# Altium PCB PCB_Lopta.PcbDoc
Units mm, origin at the board's own origin, x right, y up, seen from the top; angles counter-clockwise.
Board outline 42 x 41.3 mm, 2 copper layers (Top Layer, Bottom Layer), stack 1.671 mm thick; 27 components, 18 nets, 155 pads, 0 vias.
Unrouted connection lines stored in the file: 85.
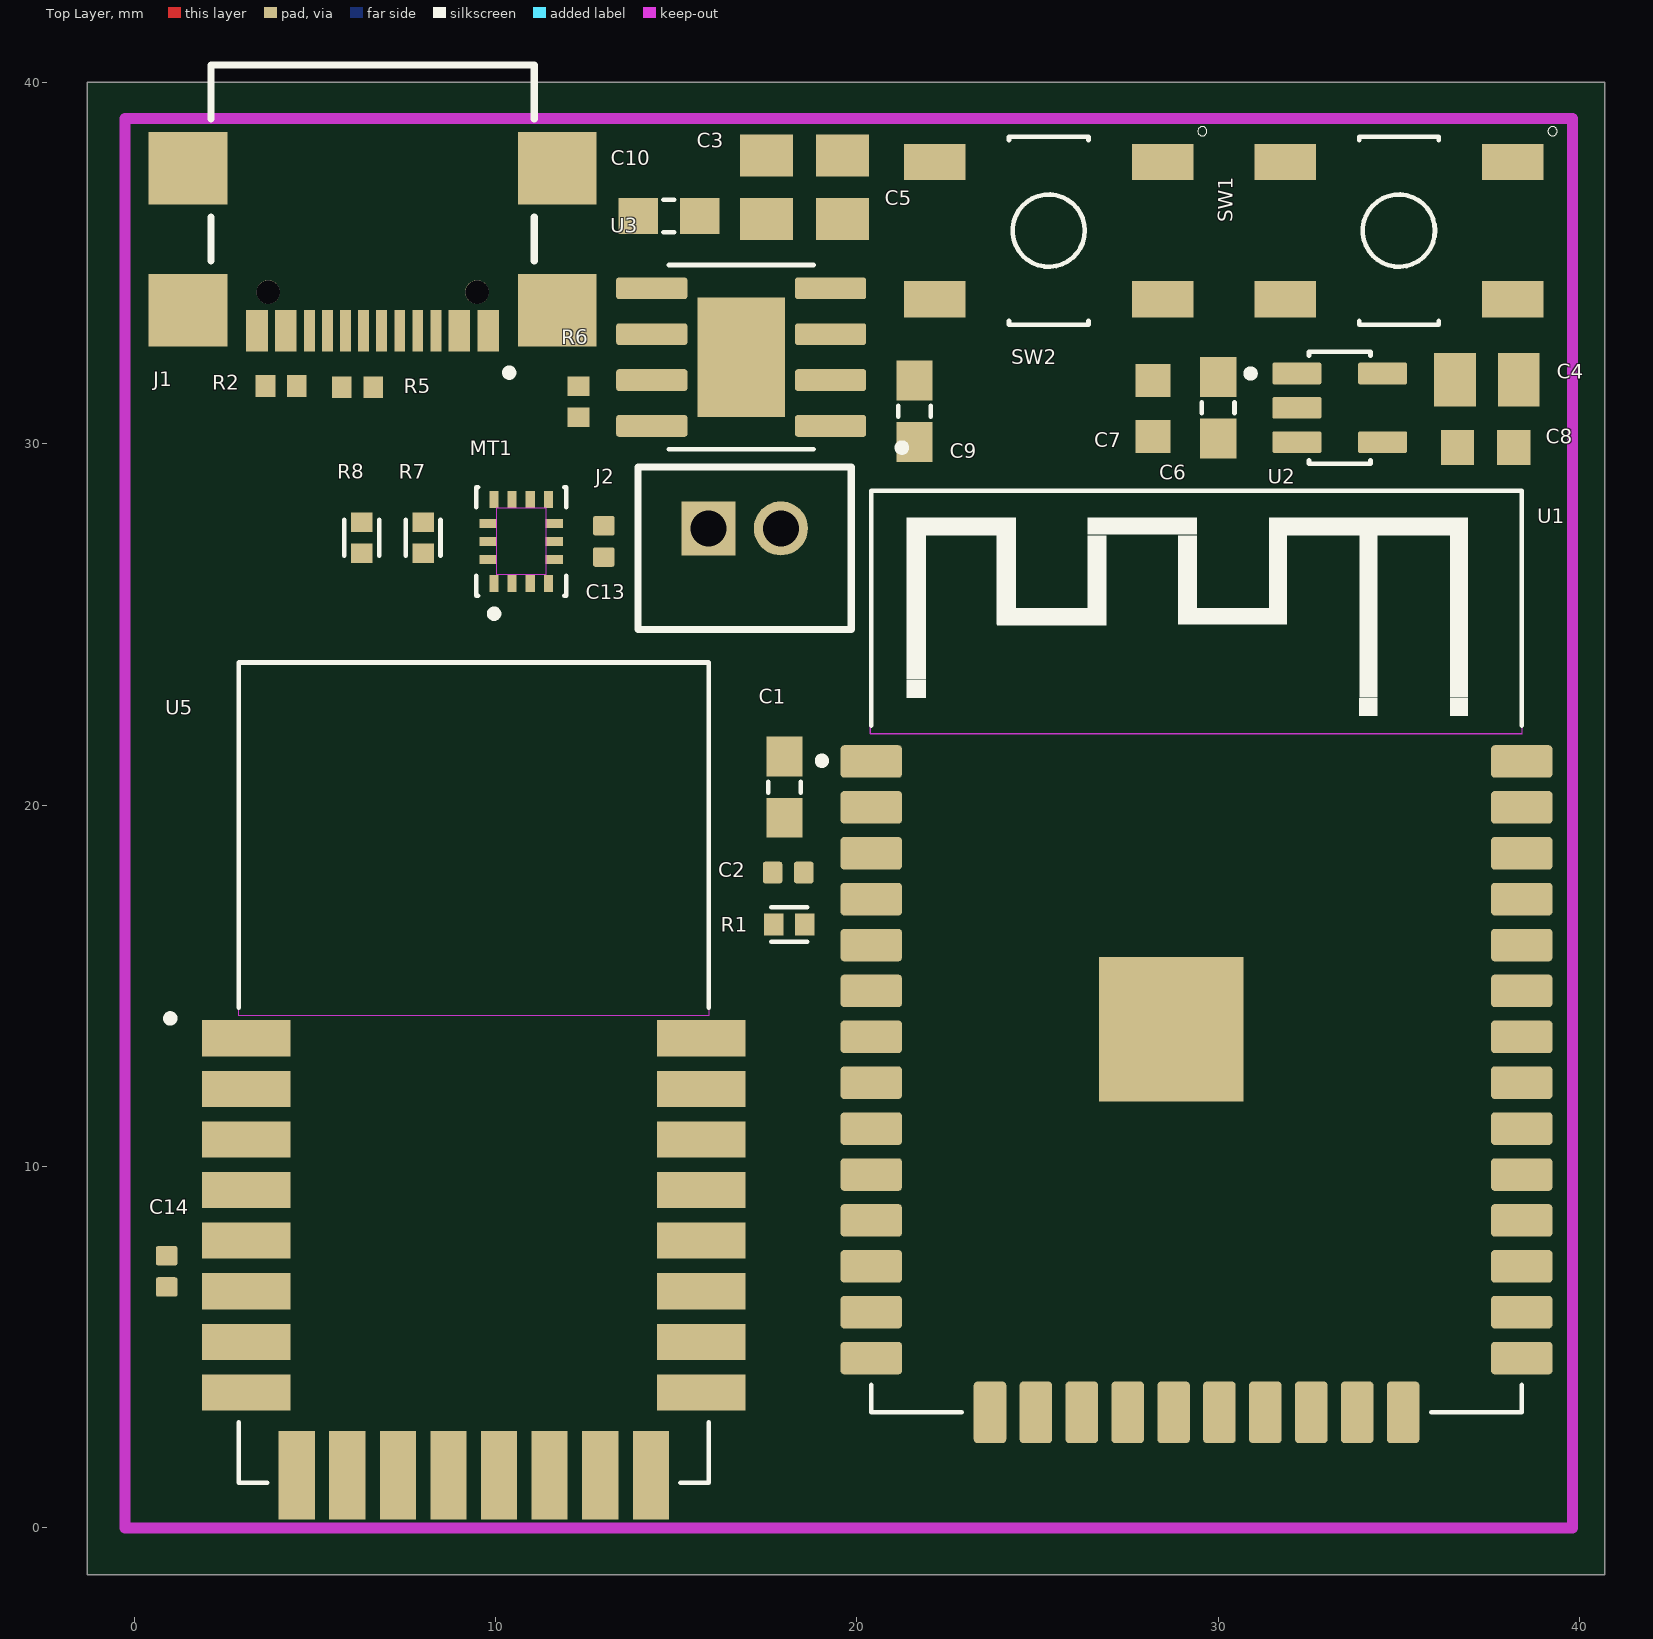
[diagram p0: Top Layer view]
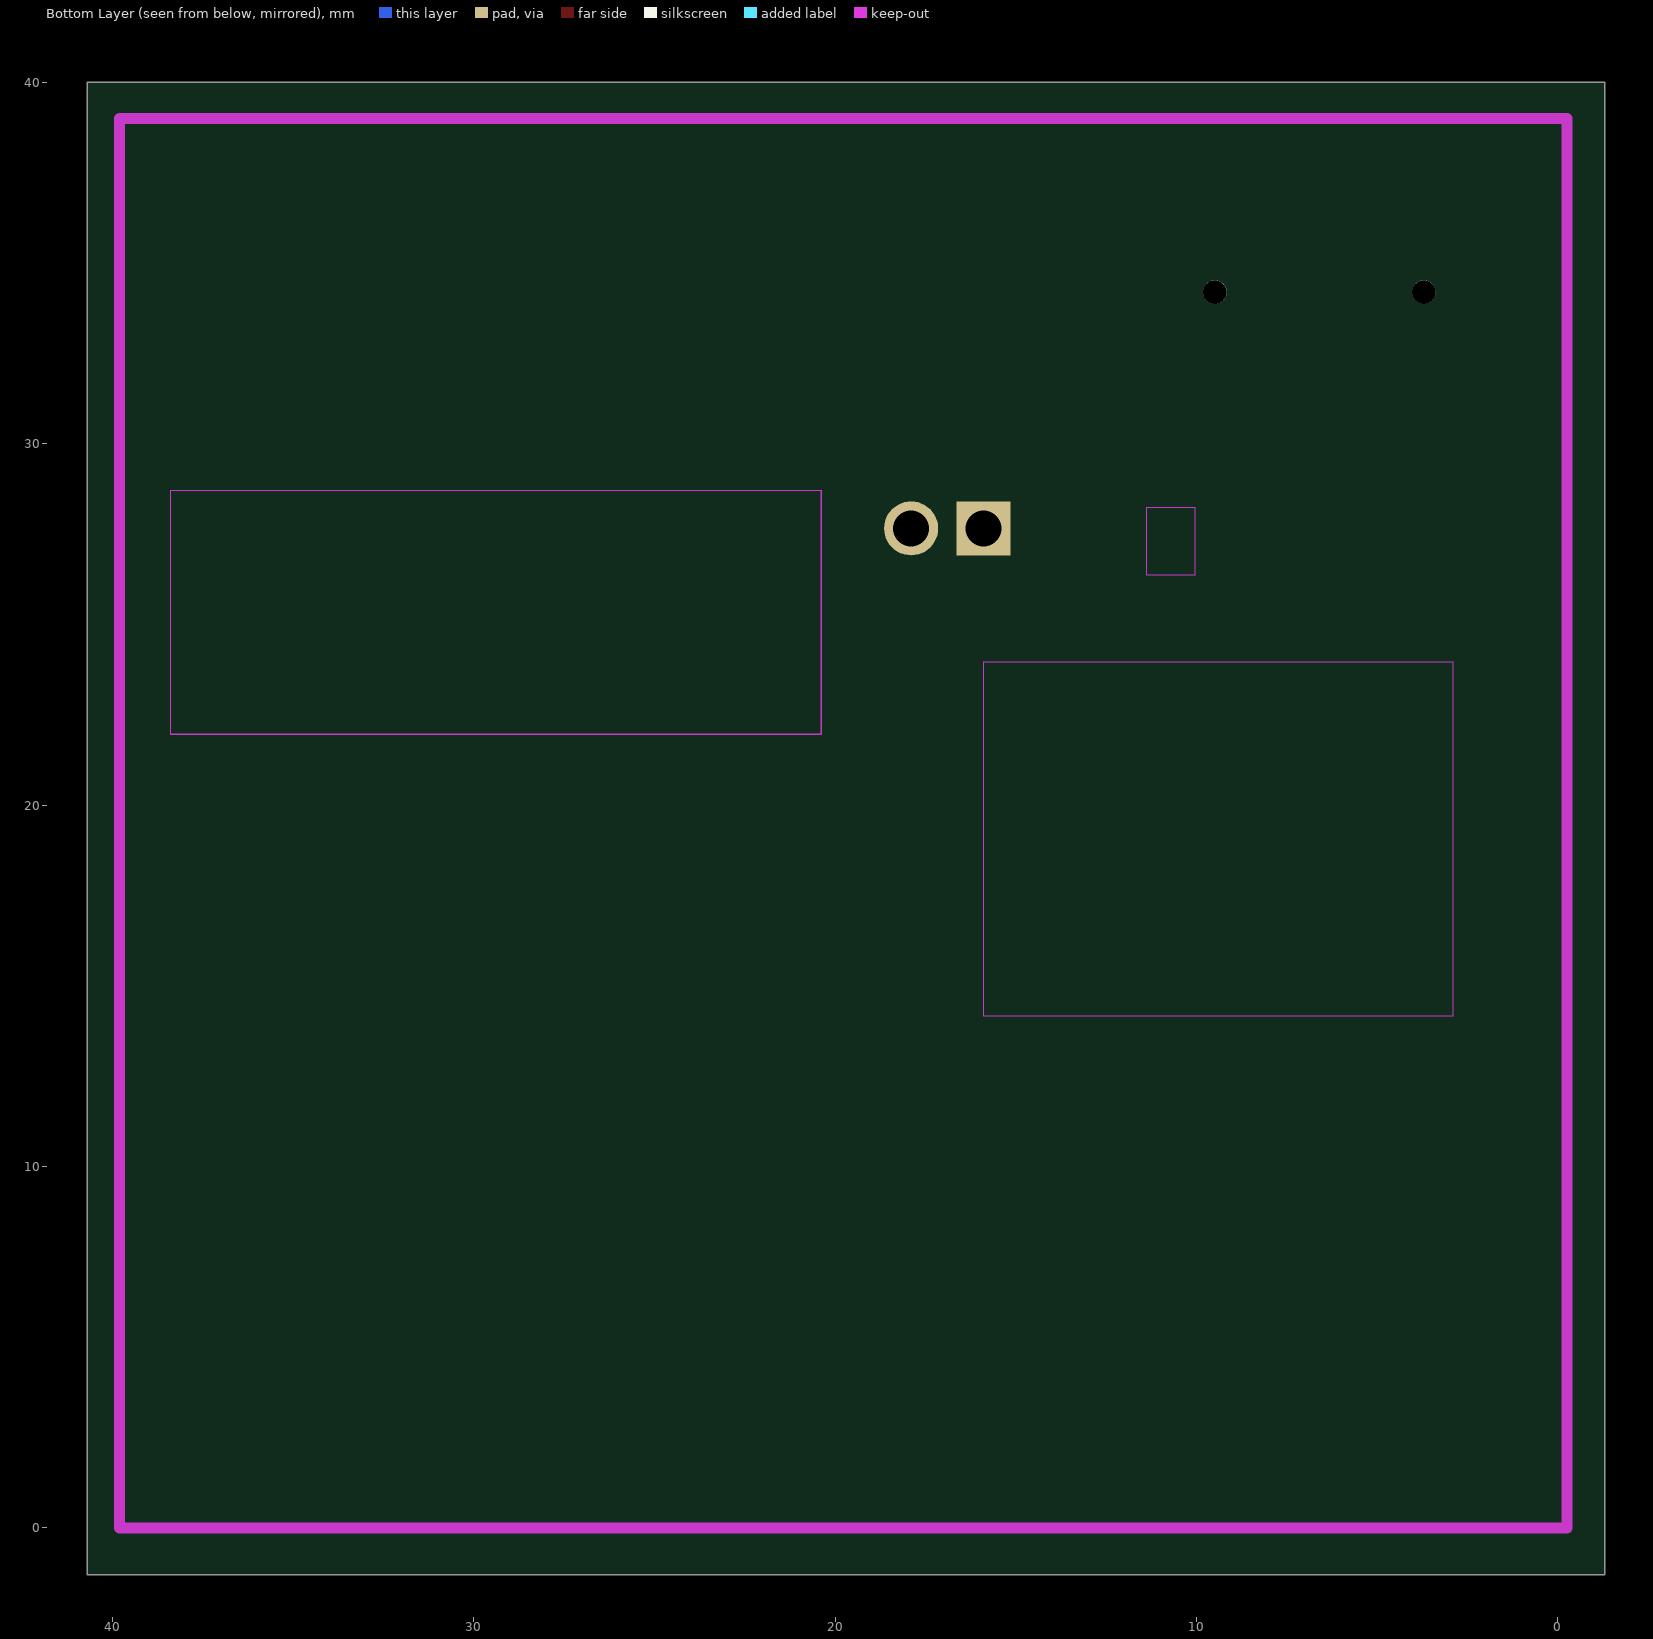
[diagram p1: Bottom Layer view, seen from below]

## Layer stack, top to bottom
Top Solder: solder mask 0.0102, Solder Resist, Dk 3.5
Top Layer: signal copper 0.0356
Dielectric1: core 1.6, FR-4, Dk 4.8
Bottom Layer: signal copper 0.0356
Bottom Solder: solder mask 0.0102, Solder Resist, Dk 3.5

## Board outline
-1.3,-1.3 40.7,-1.3 40.7,40 -1.3,40

## Design rules (kind name [scope] priority, off if disabled: settings)
Clearance [All] p1: gap=0.203 ignorepadtopadclearanceinfootprint=FALSE except(0: Arc-Hole Track-Hole SMDPad-Hole THPad-Hole Via-Hole Fill-Hole Poly-Hole Region-Hole Text-Hole)
DiffPairsRouting DiffPair_USB_DATADiffPairsRouting [InDifferentialPairClass('USB_DATA')] p1: maxlimit=0.254 minlimit=0.254 mostfreqgap=0.254 toplayer_minwidth=0.381 toplayer_maxwidth=1.27 toplayer_prefwidth=1.27 bottomlayer_minwidth=0.381 bottomlayer_maxwidth=1.27 bottomlayer_prefwidth=1.27 maxuncoupledlength=12.7
DiffPairsRouting [All] p2: maxlimit=0.254 minlimit=0.254 mostfreqgap=0.254 toplayer_minwidth=0.381 toplayer_maxwidth=0.381 toplayer_prefwidth=0.381 bottomlayer_minwidth=0.381 bottomlayer_maxwidth=0.381 bottomlayer_prefwidth=0.381 maxuncoupledlength=12.7
HoleSize HoleSize_1 [InPadClass('Mounting_Holes')] p1: absolutevalues=TRUE maxlimit=3 minlimit=0.025 maxpercent=80.000 minpercent=20.000
HoleSize Mounting_Holes [All] p2: absolutevalues=TRUE maxlimit=2.54 minlimit=0.025 maxpercent=80.000 minpercent=20.000
MatchedLengths DiffPair_USB_DATAMatchedLengths [InDifferentialPairClass('USB_DATA')] p1: tolerance=3.048 checknetsindiffpair=TRUE checkdiffpairvsdiffpair=FALSE checkxsignals=FALSE checkothers=FALSE
MinimumSolderMaskSliver [All] p1: minsoldermaskwidth=0
PolygonConnect [All] p1: connectstyle=Relief reliefconductorwidth=0.254 reliefentries=4 polygonreliefangle="90 Angle" airgapwidth=0.254
RoomDefinition U_ESP32_Module [InComponentClass('U_ESP32_Module')] p1: confinementstyle=ConfineIn formatcopy=TRUE lockcomponents=FALSE outline 0,38.862 0,30.988 11.43,30.988 11.43,29.972 12.192,29.972 12.299,29.865 12.299,24.501 12.3,24.5 17.1,24.5 17.1,14.8 17.4,14.5 17.4,0.2 39.6,0.2 39.6,38.8
RoomDefinition U_ICM-42670-P_IMU [InComponentClass('U_ICM-42670-P_IMU')] p2: confinementstyle=ConfineIn formatcopy=TRUE lockcomponents=FALSE outline 4.4,24.511 12.246,24.511 12.246,29.8 4.4,29.8
RoomDefinition U_DWM3000TR13 [InComponentClass('U_DWM3000TR13')] p3: confinementstyle=ConfineIn formatcopy=TRUE lockcomponents=FALSE outline 0.351,0.133 17.083,0.133 17.083,24.338 0.351,24.338
RoutingVias [All] p1: holewidth=0.6 width=1 viastyle="Through Hole" minholewidth=0.6 minwidth=1 maxholewidth=0.711 maxwidth=1.27
ShortCircuit ShortCircuit_ADG [InNet('AGND') vs InNet('DGND')] p1 off: allowed=TRUE
ShortCircuit [All] p2: allowed=FALSE
SilkToSolderMaskClearance SilkscreenOverComponentPads [IsPad] p1 off: minsilkscreentomaskgap=0.254 clearancetoexposedcopper=TRUE
SolderMaskExpansion [All] p1: expansion=0.102 istentingtop=FALSE
SupplyNets "Schematic Supply Nets_3" [InNet('+3.3V')] p1: voltage=0.000
SupplyNets "Schematic Supply Nets_1" [InNet('GND')] p2: voltage=0.000
Width Width_Power [InNetClass('Power')] p1: maxlimit=1.27 minlimit=0.254 preferedwidth=0.762
Width [All] p2: maxlimit=0.254 minlimit=0.254 preferedwidth=0.254
25 further rules are at their usual default settings.

## Classes and differential pairs
component class "Components Class1": C1 C2 C4 C6 C7 C8 C9 C10 C13 J2 R1 R2 R5 R6 U1 U2 U3
component class U_ICM-42670-P_IMU: C13 MT1 R7 R8
component class U_ESP32_Module: C1 C2 C3 C4 C5 C6 C7 C8 C9 C10 J1 J2 R1 R2 R5 R6 SW1 SW2 U1 U2 U3
component class U_DWM3000TR13: C14 U5

## Components (designator, comment, footprint, x,y, rotation, side; value= is the part's Value field where it differs from the comment)
C1 "Cap" CAPC1608X90 18,20.5 r270 top value=10uF
C2 "Cap" CAPC1005X55N 18.099,18.137 r180 top value=100nF
C3 "Cap" CAPC2012X94N 17.5,37.1 r90 top value=0.1uF/50V(10%)
C4 "Cap" CAPC2012X94N 37.437,31.773 r180 top value=0.1uF/50V(10%)
C5 "Cap" CAPC2012X94N 19.6,37.1 r90 top value=0.1uF/50V(10%)
C6 "Cap" CAPC1608X90 30,31 r90 top value=10uF
C7 "Cap" CAPC1608X87N 28.2,30.975 r90 top value=10nF
C8 "Cap" CAPC1608X87N 37.4,29.9 r180 top value=10nF
C9 "Cap" CAPC1608X90 21.6,30.9 r90 top value=10uF
C10 "Cap" CAPC1608X90 14.8,36.3 r180 top value=10uF
C13 "Cap" CAPC1005X55N 13,27.3 r270 top value=100nF
C14 "Cap" CAPC1005X55N 0.9,7.1 r90 top value=100nF
J1 "USB4110GFA" GCT_USB4110GFA 6.6,34.2 r180 top
J2 "B2B-PH-K-S(LF)(SN)" JST-B2B-PH-K-S_V 16.898,27.111 r0 top
MT1 "ICM-42670-P" XDCR_ICM-42670-P 10.713,27.3 r90 top
R1 "Res1" RESC1005X40 18.13,16.7 r180 top value="10k (5%)"
R2 "Res1" RESC1005X40N 4.068,31.6 r0 top value=5.1k
R5 "Res1" RESC1005X40N 6.179,31.565 r180 top value=5.1k
R6 "Res1" RESC1005X40N 12.3,31.168 r90 top value=2.4k
R7 "Res1" RESC1005X40 8,27.4 r90 top value=4.7k
R8 "Res1" RESC1005X40 6.3,27.4 r90 top value=4.7k
SW1 "SW-PB" SW_TL3342F160QG 35,35.9 r180 top
SW2 "SW-PB" SW_TL3342F160QG 25.31,35.9 r180 top
U1 "ESP-WROOM-32" MODULE_ESP-WROOM-32 29.4,12.955 r0 top
U2 "AP2112K-3.3TRG1" SOT95P285X140-5N 33.363,30.996 r0 top
U3 "TP4056" SOP127P600X175-9N 16.8,32.4 r180 top
U5 "DWM3000TR13" XCVR_DWM3000TR13 9.4,12.6 r0 top

## Footprints (in the part's own frame and the unit in brackets; to place one, negate y for a bottom-side part, rotate by r counter-clockwise, add the part's x,y. Pads: shape width x height; smd on the part's side, far side on the other; paste and mask are expansions set on the pad)
CAPC1005X55N [mm]
  rrect25% 0.54x0.6 smd: 1(-0.432,0) 2(0.432,0)
  body extent -0.5,-0.25 0.5,0.25, height 0.55
CAPC1608X87N [mm]
  rect 0.92x0.97 smd: 1(-0.775,0) 2(0.775,0)
  body extent -0.8,-0.4 0.8,0.4, height 0.87
CAPC1608X90 [mm]
  rect 1.1x1 smd: 1(-0.85,0) 2(0.85,0)
  silkscreen extent -0.15,-0.45 0.15,0.45, body extent -0.8,-0.43 0.8,0.43, height 1
CAPC2012X94N [mm]
  rect 1.16x1.47 smd: 1(-0.88,0) 2(0.88,0)
  body extent -1,-0.63 1,0.63, height 0.94
GCT_USB4110GFA [mm]
  rect 0.6x1.15 smd: A1/B12(-3.2,1.075) A4/B9(-2.4,1.075) B1/A12(3.2,1.075) B4/A9(2.4,1.075)
  rect 0.3x1.15 smd: A5(-1.25,1.075) A6(-0.25,1.075) A7(0.25,1.075) A8(1.25,1.075) B5(1.75,1.075) B6(0.75,1.075) B7(-0.75,1.075) B8(-1.75,1.075)
  rect 2.18x2 smd: S1(-5.11,0.5) S2(5.11,0.5) S3(-5.11,-3.43) S4(5.11,-3.43)
  round 0.65 hole 0.65 unplated: ""(-2.89,0) ""(2.89,0)
  silkscreen extent -4.47,-6.28 4.47,2.33, body extent -5.65,-6.28 5.65,1.42, height 3.26
JST-B2B-PH-K-S_V [mm] "Connector, 2-Leads, Body 5.9x4.5mm, Pitch 2mm"
  rect 1.5x1.5 hole 1: 1(-1,0.55)
  round 1.5 hole 1: 2(1,0.55)
  silkscreen extent -2.95,-2.25 2.95,2.25, body extent -2.95,-2.25 2.95,2.25, height 6
MODULE_ESP-WROOM-32 [mm]
  rrect22% 1.7x0.9 smd: 1(-9,8.255) 2(-9,6.985) 3(-9,5.715) 4(-9,4.445) 5(-9,3.175) 6(-9,1.905) 7(-9,0.635) 8(-9,-0.635) 9(-9,-1.905) 10(-9,-3.175) 11(-9,-4.445) 12(-9,-5.715) 13(-9,-6.985) 14(-9,-8.255) 25(9,-8.255) 26(9,-6.985) 27(9,-5.715) 28(9,-4.445) 29(9,-3.175) 30(9,-1.905) 31(9,-0.635) 32(9,0.635) 33(9,1.905) 34(9,3.175) 35(9,4.445) 36(9,5.715) 37(9,6.985) 38(9,8.255)
  rect 4x4 smd: 1.1(-0.7,0.845)
  rrect22% 0.9x1.7 smd: 15(-5.715,-9.755) 16(-4.445,-9.755) 17(-3.175,-9.755) 18(-1.905,-9.755) 19(-0.635,-9.755) 20(0.635,-9.755) 21(1.905,-9.755) 22(3.175,-9.755) 23(4.445,-9.755) 24(5.715,-9.755)
  Keep-Out Layer region: 9,9.012 -9.012,9.012 -9.012,15.75 9,15.75
  Keep-Out Layer region: 9,9.026 -9.026,9.026 -9.026,15.75 9,15.75
  silkscreen extent -10.46,-9.75 9,15.75, body extent -9,-12.75 9,12.75, height 3.25
RESC1005X40 [mm]
  rect 0.54x0.6 smd: 1(-0.43,0) 2(0.43,0)
  silkscreen extent -0.5,-0.48 0.5,0.48, body extent -0.5,-0.25 0.5,0.25, height 0.4
RESC1005X40N [mm]
  rect 0.54x0.6 smd: 1(-0.432,0) 2(0.432,0)
  body extent -0.5,-0.25 0.5,0.25, height 0.4
SOP127P600X175-9N [mm]
  rrect25% 1.97x0.6 smd: 1(-2.475,1.905) 2(-2.475,0.635) 3(-2.475,-0.635) 4(-2.475,-1.905) 5(2.475,-1.905) 6(2.475,-0.635) 7(2.475,0.635) 8(2.475,1.905)
  rect 2.413x3.302 smd paste-3: 9(0,0)
  silkscreen extent -4.54,-2.55 2,2.6, body extent -3,-2.45 3,2.45, height 1.75
SOT95P285X140-5N [mm]
  rrect15% 1.35x0.6 smd: 1(-1.185,0.95) 2(-1.185,0) 3(-1.185,-0.95) 4(1.185,-0.95) 5(1.185,0.95)
  silkscreen extent -2.57,-1.55 0.85,1.55, body extent -1.5,-1.4 1.5,1.4, height 1.4
SW_TL3342F160QG [mm]
  rect 1.7x1 smd paste+0 mask+0.102: 1(-3.15,-1.9) 2(3.15,-1.9) 3(-3.15,1.9) 4(3.15,1.9)
  silkscreen extent -4.38,-2.88 1.1,2.6, body extent -3.3,-2.5 3.3,2.5, height 1.46
XCVR_DWM3000TR13 [mm]
  rect 2.45x1 smd: 1(-6.295,0.95) 2(-6.295,-0.45) 3(-6.295,-1.85) 4(-6.295,-3.25) 5(-6.295,-4.65) 6(-6.295,-6.05) 7(-6.295,-7.45) 8(-6.295,-8.85) 17(6.295,-8.85) 18(6.295,-7.45) 19(6.295,-6.05) 20(6.295,-4.65) 21(6.295,-3.25) 22(6.295,-1.85) 23(6.295,-0.45) 24(6.295,0.95)
  rect 1x2.45 smd: 9(-4.9,-11.145) 10(-3.5,-11.145) 11(-2.1,-11.145) 12(-0.7,-11.145) 13(0.7,-11.145) 14(2.1,-11.145) 15(3.5,-11.145) 16(4.9,-11.145)
  Keep-Out Layer region: 6.5,1.575 -6.5,1.575 -6.5,11.35 6.5,11.35
  Keep-Out Layer region: 6.5,1.575 -6.5,1.575 -6.5,11.35 6.5,11.35
  silkscreen extent -8.5,-11.35 6.5,11.35, body extent -6.5,-11.35 6.5,11.35, height 2.89
XDCR_ICM-42670-P [mm]
  rect 0.475x0.25 smd paste-1 mask+0.05: 1(-1.162,0.75) 2(-1.162,0.25) 3(-1.162,-0.25) 4(-1.162,-0.75) 8(1.162,-0.75) 9(1.162,-0.25) 10(1.162,0.25) 11(1.162,0.75)
  rect 0.25x0.475 smd paste-1 mask+0.05: 5(-0.5,-0.913) 6(0,-0.913) 7(0.5,-0.913) 12(0.5,0.913) 13(0,0.913) 14(-0.5,0.913)
  Keep-Out Layer region: 0.925,-0.675 -0.925,-0.675 -0.925,0.675 0.925,0.675
  silkscreen extent -2.1,-1.25 1.5,1.25, body extent -1.5,-1.25 1.5,1.25, height 0.81

## Part data
C1 C2 C3 C4 C5 C6 C7 C8 C9 C10 C13 C14: "Capacitor", LatestRevisionDate=17-Jul-2002, LatestRevisionNote="Re-released for DXP Platform.", PackageDescription="Radial Cap, Thru-Hole; 2 Leads; 0.3 in Pin Spacing", PackageReference=RAD-0.3, Published=8-Jun-2000, Publisher="Altium Limited"
J1: "USB-C (USB TYPE-C) USB 2.0 Receptacle Connector 24 (16+8 Dummy) Position Surface Mount, Right Angle", Package=None, Check_prices=https://www.snapeda.com/parts/USB4110GFA/Global+Connector+Technology/view-part/?ref=eda, MF="Global Connector Technology", MP=USB4110GFA, SnapEDA_Link=https://www.snapeda.com/parts/USB4110GFA/Global+Connector+Technology/view-part/?ref=snap
J2: library part CMP-2000-05162-1, "Male Header, Pitch 2 mm, 1 x 2 Position, Height 6 mm, Tail Length 3.4 mm, -25 to 85 degC, RoHS, Bulk", Manufacturer=JST, Datasheet URL=http://datasheet.octopart.com/B2B-PH-K-S%28LF%29%28SN%29-JST-datasheet-8324864.pdf, Datasheet Version=Nov-08, Manufacturer URL=http://www.jst.com/home2.html, No of Positions=2, Pitch=2mm, Style/Orientation=StraightHeader/Plug, Termination=Crimp, Type=ShroudedHeader
MT1: Package=None, Availability=Unavailable, MP=ICM-42670-P, Price=None
R1 R2 R5 R6 R7 R8: "Resistor", LatestRevisionDate=17-Jul-2002, LatestRevisionNote="Re-released for DXP Platform.", PackageDescription="Axial Device, Thru-Hole; 2 Leads; 0.3 in Pin Spacing", PackageReference=AXIAL-0.3, Published=8-Jun-2000, Publisher="Altium Limited"
SW1 SW2: "Switch", LatestRevisionDate=17-Jul-2002, LatestRevisionNote="Re-released for DXP Platform.", PackageDescription="Switch; 2 Leads", PackageReference=SPST-2, Published=24-Mar-1999, Publisher="Altium Limited"
U1: "Transceptor serie ESP-WROOM-32; Placa de evaluaciÃ³n 802.11 b/g/n (Wi-Fi, WiFi, WLAN), BluetoothÂ® Smart 4.x de bajo consumo (BLE)", Package="Module Espressif Systems", Check_prices=https://www.snapeda.com/parts/ESP-WROOM-32/Espressif+Systems/view-part/?ref=eda, MF="Espressif Systems", MP=ESP-WROOM-32, SnapEDA_Link=https://www.snapeda.com/parts/ESP-WROOM-32/Espressif+Systems/view-part/?ref=snap
U2: "Linear Voltage Regulator IC Positive Fixed 1 Output 600mA SOT-25", Package="SOT-753 Diodes Inc.", Availability="In Stock", Check_prices=https://www.snapeda.com/parts/AP2112K-3.3TRG1/Diodes+Inc./view-part/?ref=eda, MF="Diodes Inc.", MP=AP2112K-3.3TRG1, Price=None, Purchase-URL=https://pricing.snapeda.com/search/part/AP2112K-3.3TRG1/?ref=eda, SnapEDA_Link=https://www.snapeda.com/parts/AP2112K-3.3TRG1/Diodes+Inc./view-part/?ref=snap
U3: "Complete single cell Li-Ion battery with a constant current / constant voltage linear charger", Package=Package, Availability="Not in stock", Check_prices=https://www.snapeda.com/parts/TP4056/NanJing+Top+Power+ASIC+Corp./view-part/?ref=eda, MF="NanJing Top Power ASIC Corp.", MP=TP4056, Price=None, SnapEDA_Link=https://www.snapeda.com/parts/TP4056/NanJing+Top+Power+ASIC+Corp./view-part/?ref=snap
U5: "802.15.4, Bluetooth, Cellular UWB, ZigbeeÂ® Transceiver Module 6.25GHz ~ 8.25GHz Integrated, Ceramic Patch Surface Mount", Package=None, Check_prices=https://www.snapeda.com/parts/DWM3000TR13/Qorvo/view-part/?ref=eda, MF=Qorvo, MP=DWM3000TR13, SnapEDA_Link=https://www.snapeda.com/parts/DWM3000TR13/Qorvo/view-part/?ref=snap

## Nets (pads, with @x,y where several pads share a name; then routed paths per layer and width w, separated by ;. In a path a pad name is that pad's centre, name@x,y a point inside that pad or via, vN(x,y) a via of type N, cw(c..) or ccw(c..) an arc to the next point about the centre after c; other vN are vias at no path point)
+3.3V: C1.2 C2.2 C7.2 C8.2 C13.2 C14.2 MT1.5 MT1.8 MT1.12 R1.2 R7.2 R8.2 U1.2 U2.5 U5.5 U5.6 U5.7
EN: C3.2 C5.2 R1.1 SW2.2 U1.3
GND: C1.1 C2.1 C3.1 C4.1 C5.1 C6.1 C7.1 C8.1 C9.1 C10.1 C13.1 C14.1 J1.A1/B12 J1.B1/A12 J1.S1 J1.S2 J1.S3 J1.S4 J2.2 MT1.1 MT1.6 MT1.7 R2.1 R5.2 R6.1 SW1.1 SW2.1 U1.1 U1.1.1 U1.15 U1.38 U2.2 U3.1 U3.3 U3.9 U5.2 U5.8 U5.16 U5.21 U5.23 U5.24
IO0: C4.2 SW1.2 U1.25
NetJ1_A5: J1.A5 R2.2
NetJ1_B5: J1.B5 R5.1
NetMT1_4: MT1.4 U1.7
NetMT1_13: MT1.13 R7.1 U1.36
NetMT1_14: MT1.14 R8.1 U1.33
NetR6_2: R6.2 U3.2
NetU1_6: U1.6 U5.22
NetU1_12: U1.12 U5.3
NetU1_29: U1.29 U5.17
NetU1_30: U1.30 U5.20
NetU1_31: U1.31 U5.19
NetU1_37: U1.37 U5.18
V_BAT: C6.2 C10.2 J2.1 U2.1 U2.3 U3.5
V_USB: C9.2 J1.A4/B9 J1.B4/A9 U3.4 U3.8
pads on no net: J1. J1.A6 J1.A7 J1.A8 J1.B6 J1.B7 J1.B8 MT1.2 MT1.3 MT1.9 MT1.10 MT1.11 SW1.3 SW1.4 SW2.3 SW2.4 U1.4 U1.5 U1.8 U1.9 U1.10 U1.11 U1.13 U1.14 U1.16 U1.17 U1.18 U1.19 U1.20 U1.21 U1.22 U1.23 U1.24 U1.26 U1.27 U1.28 U1.32 U1.34 U1.35 U2.4 U3.6 U3.7 U5.1 U5.4 U5.9 U5.10 U5.11 U5.12 U5.13 U5.14 U5.15

## Keep-outs
Keep-Out Layer:
  lines w0.3: -0.254,0 -0.254,39 39.8,39 39.8,0 -0.254,0

## Dimensions
-0.254,0 to 39.8,0 on Mechanical 1
-0.254,39 to -0.254,0 on Mechanical 1